# Altium PCB KeyBoard.PcbDoc
Units mm, origin at the board's own origin, x right, y up, seen from the top; angles counter-clockwise.
Board outline 100.33 x 80.33 mm, 2 copper layers (Top Layer, Bottom Layer); 58 components, 46 nets, 201 pads, 48 vias.
Unrouted connection lines stored in the file: 1.
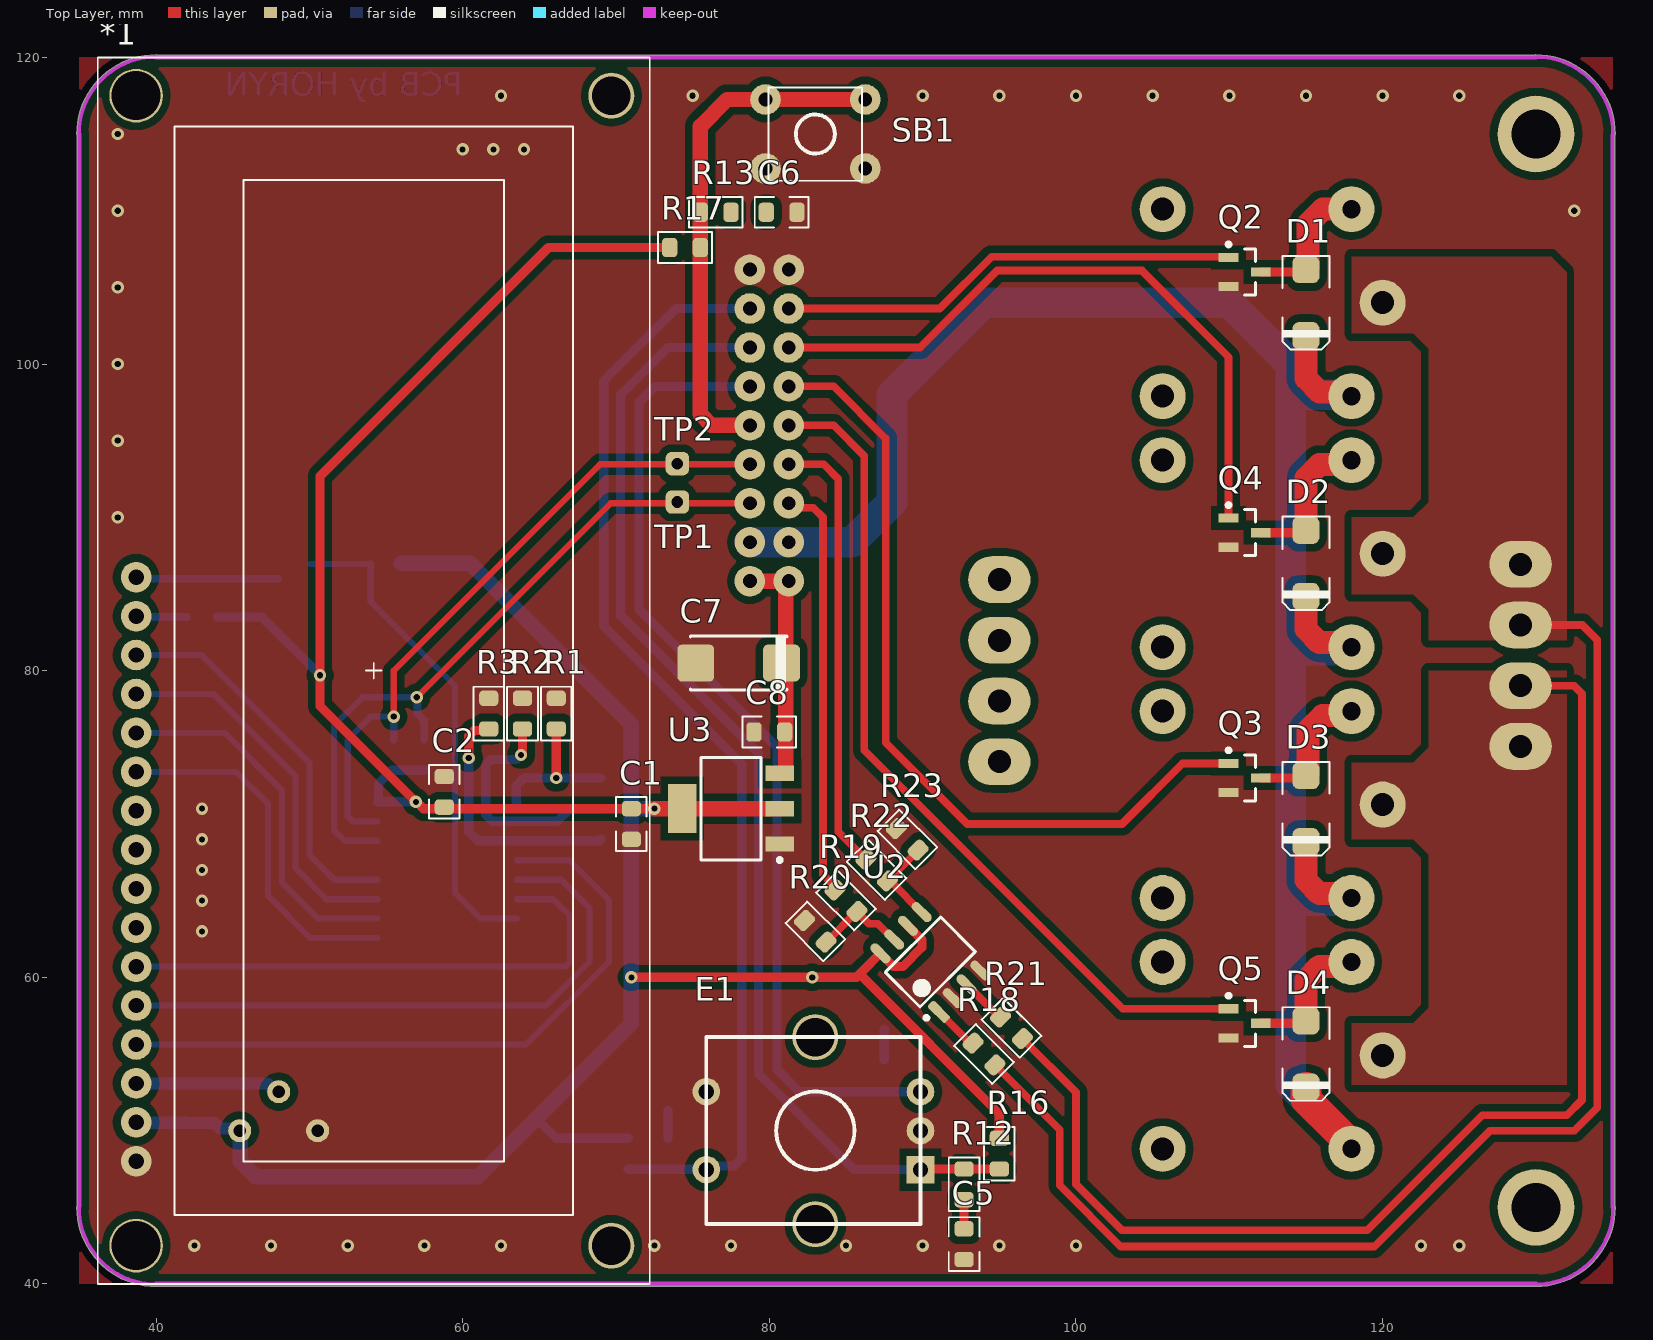
[diagram p0: Top Layer view]
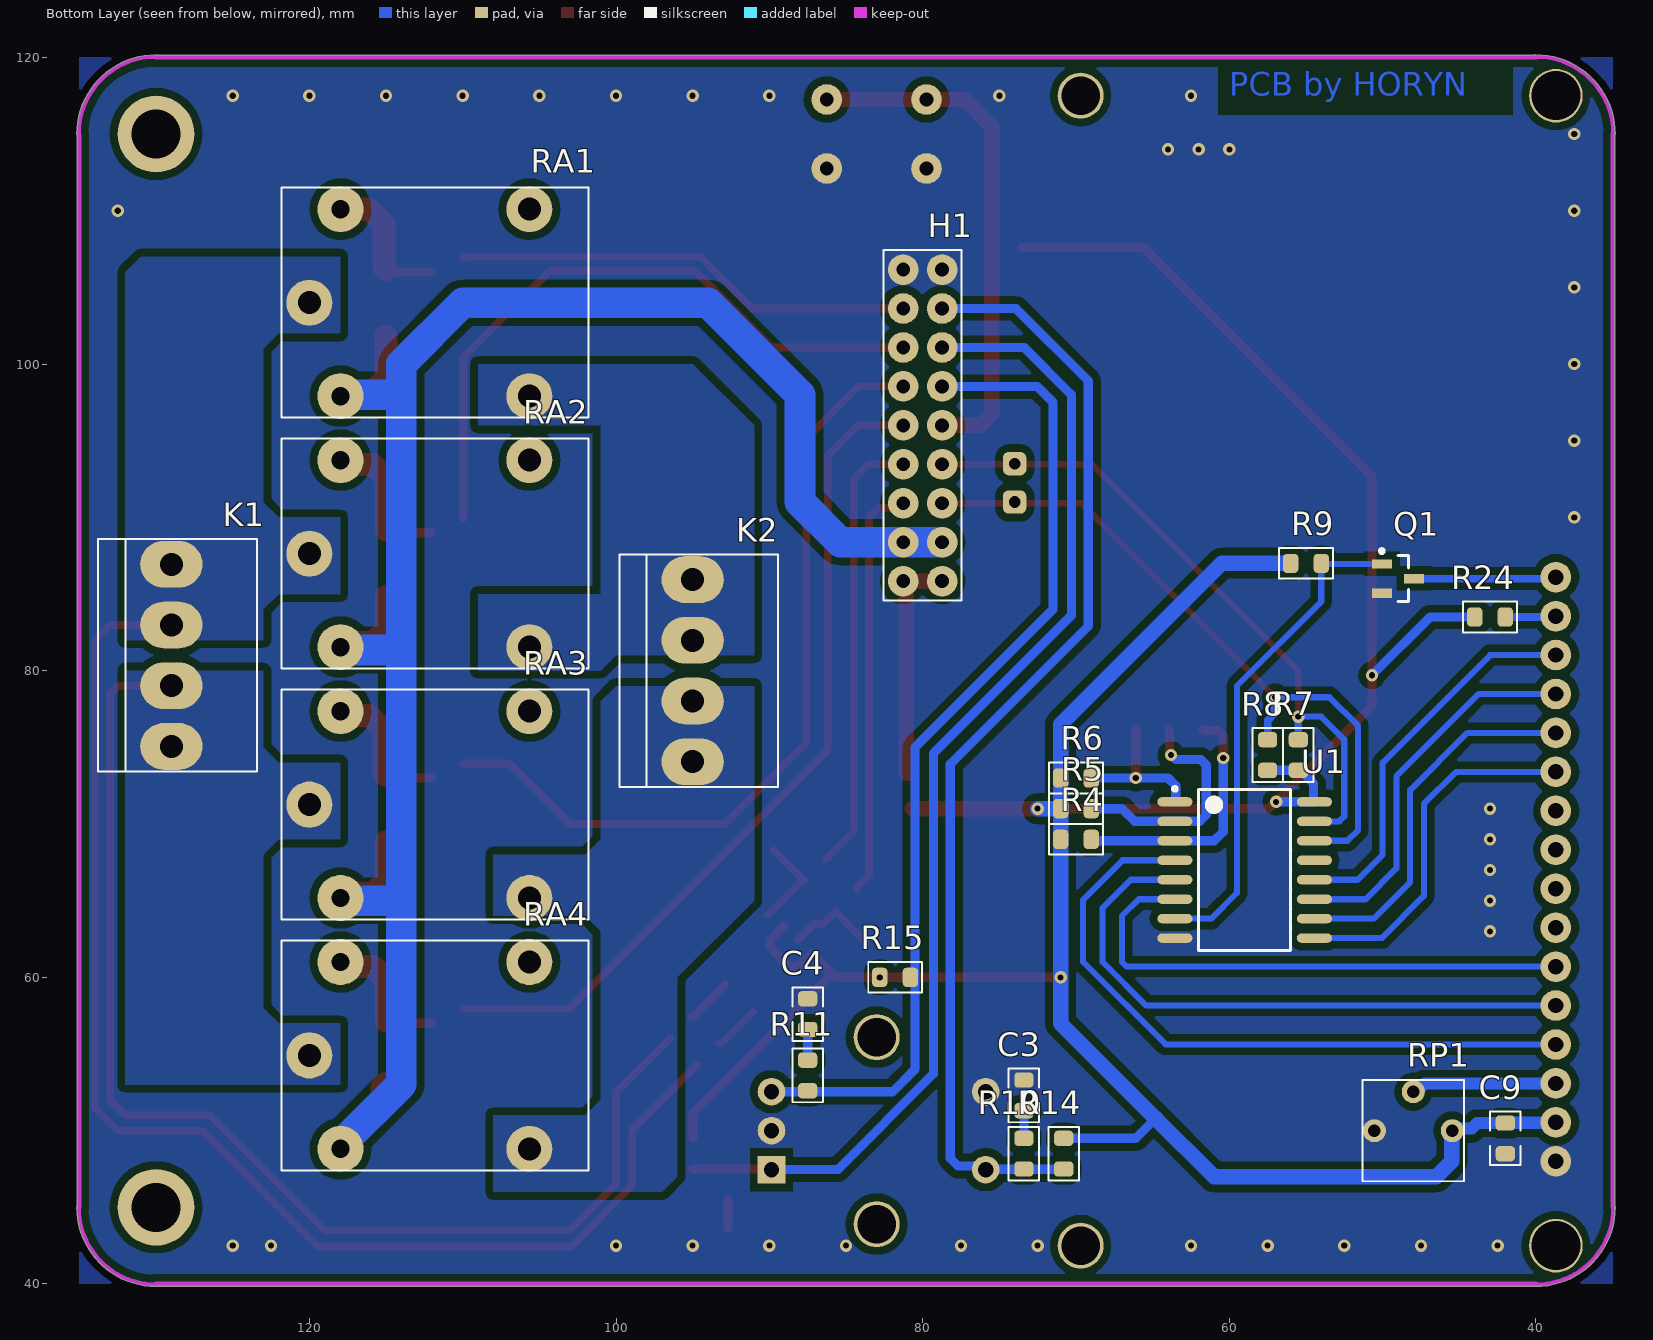
[diagram p1: Bottom Layer view, seen from below]
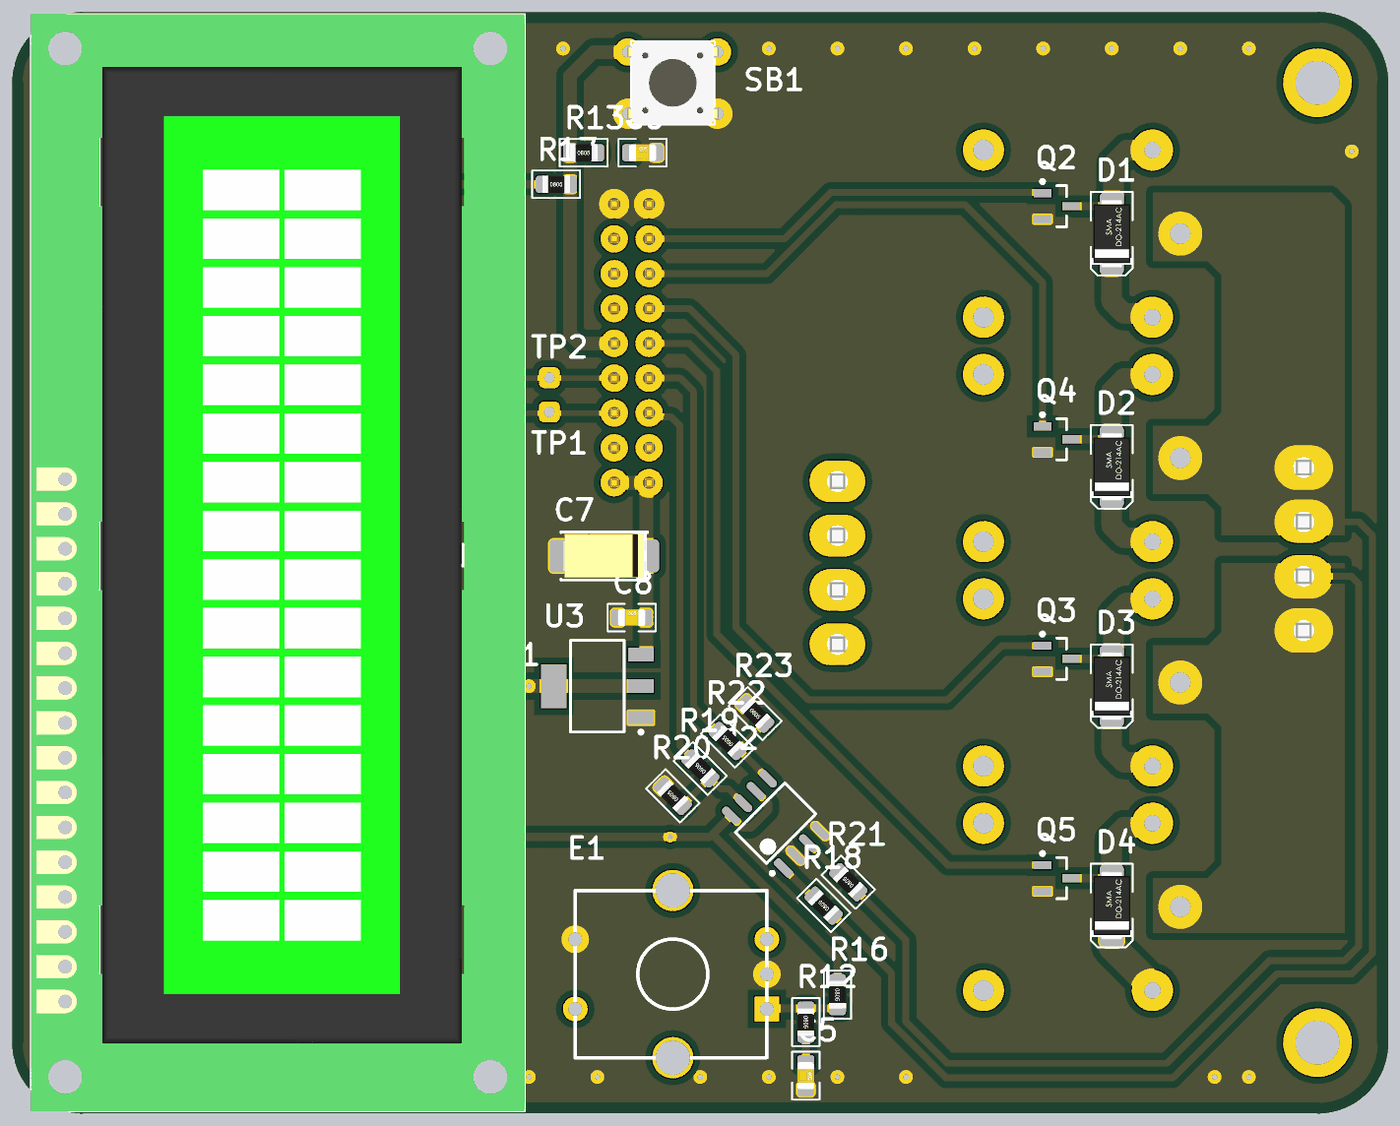
[diagram p2: 3D render of the assembled board from above, using the file's embedded part models]
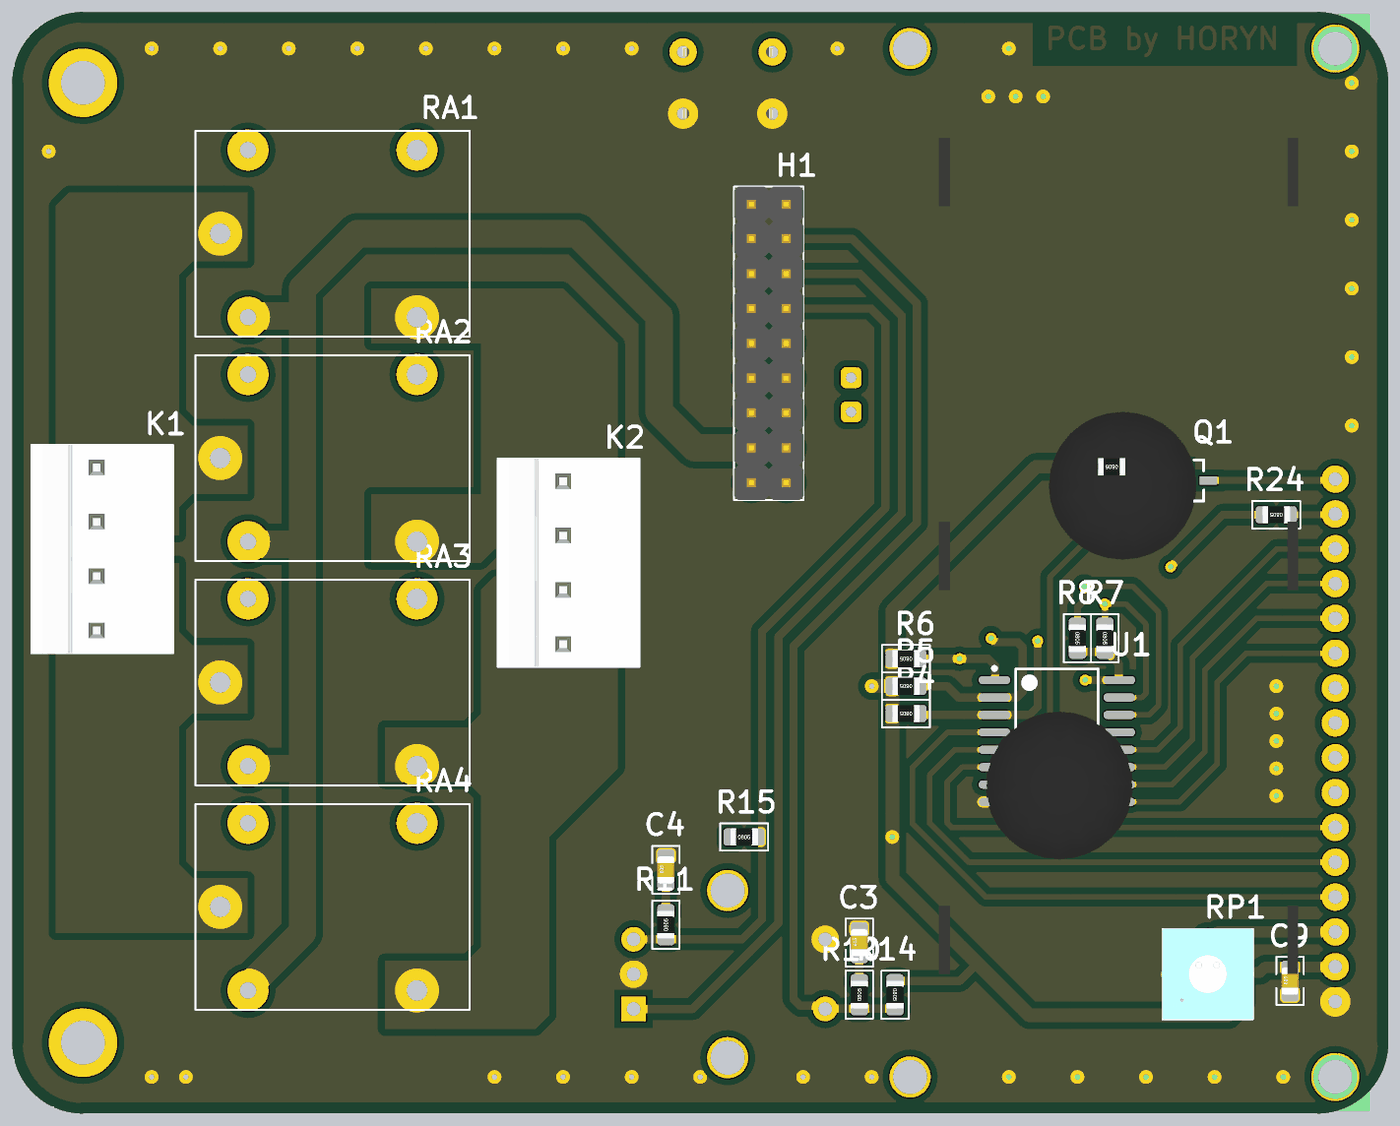
[diagram p3: 3D render of the assembled board from below, using the file's embedded part models]

## Layer stack, top to bottom
Top Solder: solder mask 0.0102, Solder Resist, Dk 3.5
Top Layer: signal copper 0.0356
Dielectric 1: dielectric 0.32, FR-4, Dk 4.8
Bottom Layer: signal copper 0.0356
Bottom Solder: solder mask 0.0102, Solder Resist, Dk 3.5

## Board outline
40,39.837 cw(c40,45) 34.837,45 cw(c34.964,45) 34.85,45.056 34.85,114.944 cw(c34.964,115) 34.837,115 cw(c40,115) 40,120.163 cw(c40,120.036) 40.056,120.15 129.944,120.15 cw(c130,120.036) 130,120.163 cw(c130,115) 135.163,115 cw(c135.036,115) 135.15,114.944 135.15,45.056 cw(c135.036,45) 135.163,45 cw(c130,45) 130,39.837 cw(c130,39.964) 129.944,39.85 40.056,39.85 cw(c40,39.964)

## Design rules (kind name [scope] priority, off if disabled: settings)
Clearance Clearance_12V [InNet('12V')] p1: gap=0.5 ignorepadtopadclearanceinfootprint=FALSE
Clearance Clearance_GND [InNet('GND')] p2: gap=0.5 ignorepadtopadclearanceinfootprint=FALSE
Clearance [All] p3: gap=0.3 ignorepadtopadclearanceinfootprint=FALSE
ComponentClearance [All] p1: gap=0 collisioncheckmode=3 verticalgap=0 showdistances=FALSE
PolygonConnect [All] p1: connectstyle=Direct reliefconductorwidth=0.254 reliefentries=4 polygonreliefangle="90 Angle" airgapwidth=0.254
RoutingVias [All] p1: holewidth=0.711 width=1.27 viastyle="Through Hole" minholewidth=0.711 minwidth=1.27 maxholewidth=0.711 maxwidth=1.27
SolderMaskExpansion [All] p1: expansion=0.102
Width [All] p1: maxlimit=10 minlimit=0.3 preferedwidth=0.3
29 further rules are at their usual default settings.

## Classes and differential pairs
component class PWR: C7 C8 C9 U3
component class MCU: C3 C4 C5 C6 D1 D2 D3 D4 E1 H1 K1 K2 Q2 Q3 Q4 Q5 R10 R11 R12 R13 R14 R15 R16 R17 R18 R19 R20 R21 R22 R23 RA1 RA2 RA3 RA4 SB1 TP1 TP2 U2
component class LCD: *1 C1 C2 Q1 R1 R2 R3 R4 R5 R6 R7 R8 R9 R24 RP1 U1

## Components (designator, comment, footprint, x,y, rotation, side; value= is the part's Value field where it differs from the comment)
*1 "AC162B 2x16" "AC-162B 2x16" 54.2,80 r90 top
C1 "100n" C0805(2013) 71,70 r90 top
C2 "100n" C0805(2013) 58.8,72.1 r270 top
C3 "100n" C0805(2013) 73.4,52.3 r90 bottom
C4 "100n" C0805(2013) 87.5,57.6 r90 bottom
C5 "100n" C0805(2013) 92.7,42.6 r270 top
C6 "100n" C0805(2013) 80.8,109.9 r0 top
C7 "x" "EL Case C (6032-28)" 78,80.5 r180 top
C8 "100n" C0805(2013) 80,76 r0 top
C9 "100n" C0805(2013) 42,49.5 r90 bottom
D1 "1N4148" "DO-214AC (SMA)" 115,104 r270 top
D2 "1N4148" "DO-214AC (SMA)" 115,87 r270 top
D3 "1N4148" "DO-214AC (SMA)" 115,71 r270 top
D4 "1N4148" "DO-214AC (SMA)" 115,55 r270 top
E1 "Encoder SW" PEC12 83,50 r0 top
H1 "H-2x9" J2x9 80,96 r90 bottom
K1 "PWL4S" PWL4S 129,81 r90 bottom
K2 "PWL4S" PWL4S 95,80 r90 bottom
Q1 "BC817-40" SOT23_N 49,86 r180 bottom
Q2 "BC817-40" SOT23_N 111,106 r0 top
Q3 "BC817-40" SOT23_N 111,73 r0 top
Q4 "BC817-40" SOT23_N 111,89 r0 top
Q5 "BC817-40" SOT23_N 111,57 r0 top
R1 "0R" R0805 66.1,77.2 r90 top
R2 "0R" R0805 63.9,77.2 r90 top
R3 "0R" R0805 61.7,77.2 r90 top
R4 "10K" R0805 70,69 r0 bottom
R5 "10K" R0805 70,71 r0 bottom
R6 "10K" R0805 70,73 r0 bottom
R7 "4.7K" R0805 55.5,74.5 r270 bottom
R8 "4.7K" R0805 57.5,74.5 r270 bottom
R9 "10K" R0805 55,87 r0 bottom
R10 "100R" R0805 73.4,48.5 r90 bottom
R11 "100R" R0805 87.5,53.6 r90 bottom
R12 "100R" R0805 92.7,46.5 r270 top
R13 "100R" R0805 76.5,109.9 r0 top
R14 "10K" R0805 70.8,48.5 r270 bottom
R15 "10K" R0805 81.8,60 r180 bottom
R16 "10K" R0805 95,48.5 r270 top
R17 "10K" R0805 74.5,107.6 r0 top
R18 "1k" R0805 94,55 r135 top
R19 "100R" R0805 85,65 r135 top
R20 "10K" R0805 83,63 r135 top
R21 "1k" R0805 95.793,56.707 r135 top
R22 "100R" R0805 87,67 r135 top
R23 "10K" R0805 89,69 r315 top
R24 "0R" R0805 43,83.5 r0 bottom
RA1 "RAS" "Rele RAS" 111.808,104 r180 bottom
RA2 "RAS" "Rele RAS" 111.808,87.635 r180 bottom
RA3 "RAS" "Rele RAS" 111.808,71.269 r180 bottom
RA4 "RAS" "Rele RAS" 111.808,54.904 r180 bottom
RP1 "10k" "R-Tr 3362P" 48,50 r180 bottom
SB1 "TS-06" TS-06 83,115 r90 top
TP1 "TP" TP_TH 74,91 r0 top
TP2 "TP" TP_TH 74,93.5 r90 top
U1 "PCF8574DW" DW16_N 59,67 r180 bottom
U2 "MOCD217" "SO-8 (MOCD217)" 90.5,61 r135 top
U3 "TLV1117LV30DCYT" TI-DCY4_N 77.5,71 r180 top

## Footprints (in the part's own frame and the unit in brackets; to place one, negate y for a bottom-side part, rotate by r counter-clockwise, add the part's x,y. Pads: shape width x height; smd on the part's side, far side on the other; paste and mask are expansions set on the pad)
"AC-162B 2x16" [mm]
  round 3 hole 2.5: 0(-37.5,-15.5) 0(37.5,-15.5)
  round 3.5 hole 3.2: 0(-37.5,15.5) 0(37.5,15.5)
  round 2 hole 1: 1(-32,15.5) 2(-29.46,15.5) 3(-26.92,15.5) 4(-24.38,15.5) 5(-21.84,15.5) 6(-19.3,15.5) 7(-16.76,15.5) 8(-14.22,15.5) 9(-11.68,15.5) 10(-9.14,15.5) 11(-6.6,15.5) 12(-4.06,15.5) 13(-1.52,15.5) 14(1.02,15.5) 15(3.56,15.5) 16(6.1,15.5)
  silkscreen extent -40,-18 40,18, body extent -40,-18 40,18, height 11
C0805(2013) [mm]
  rrect50% 1x1.25 smd: 1(-1,0) 2(1,0)
  silkscreen extent -1.75,-1 1.75,1, body extent -1,-0.62 1,0.63, height 0.73
"DO-214AC (SMA)" [mil] "DO-214-AC/SMA; 2 C-Bend Leads; Body 5 x 2.7 mm, inc. leads (LxW)"
  rrect50% 70x70 smd: 1(-85,0) 2(85,0)
  silkscreen extent -120,-60 120,60, body extent -98,-53 98,53, height 85
DW16_N [mm] "SOIC, 16-Leads, Body 10.3x7.5mm, Pitch 1.27mm, IPC Medium Density"
  oval 2.3x0.6 smd: 1(-4.55,4.445) 2(-4.55,3.175) 3(-4.55,1.905) 4(-4.55,0.635) 5(-4.55,-0.635) 6(-4.55,-1.905) 7(-4.55,-3.175) 8(-4.55,-4.445) 9(4.55,-4.445) 10(4.55,-3.175) 11(4.55,-1.905) 12(4.55,-0.635) 13(4.55,0.635) 14(4.55,1.905) 15(4.55,3.175) 16(4.55,4.445)
  silkscreen extent -4.67,-5.25 3,5.42, body extent -3.79,-5.25 3.8,5.25, height 2.64
"EL Case C (6032-28)" [mm] "Capacitor, SM Tantalum; Body 6.0 x 3.2 mm (LxW typ)"
  rrect25% 2.4x2.4 smd: 1(-2.8,0) 2(2.8,0)
  silkscreen extent -3.15,-1.75 3.15,1.75, body extent -3,-1.6 3,1.6, height 2.51
J2x9 [mm]
  round 2 hole 0.9: 1(-10.16,-1.27) 2(-10.16,1.27) 3(-7.62,-1.27) 4(-7.62,1.27) 5(-5.08,-1.27) 6(-5.08,1.27) 7(-2.54,-1.27) 8(-2.54,1.27) 9(0,-1.27) 10(0,1.27) 11(2.54,-1.27) 12(2.54,1.27) 13(5.08,-1.27) 14(5.08,1.27) 15(7.62,-1.27) 16(7.62,1.27) 17(10.16,-1.27) 18(10.16,1.27)
  silkscreen extent -11.43,-2.54 11.43,2.54, body extent -11.43,-2.54 11.43,2.54, height 10.1
PEC12 [mm] "Incremental encoder with switch"
  rect 1.8x1.8 hole 1: 1(6.858,-2.54)
  round 1.8 hole 1: 2(6.858,0) 3(6.858,2.54) 4(-7.112,-2.54) 5(-7.112,2.54)
  round 3 hole 2.5: 6(0,-6.096) 7(0,6.096)
  silkscreen extent -7.11,-6.1 6.86,6.1
PWL4S [mm]
  oval 3.048x4.064 hole 1.5: 1(5.94,0) 2(1.98,0) 3(-1.98,0) 4(-5.94,0)
  silkscreen extent -7.59,-5.57 7.59,4.78, body extent -7.59,-5.57 7.59,4.78, height 15
R0805 [mm]
  rrect50% 1x1.25 smd: 1(-1,0) 2(1,0)
  silkscreen extent -1.75,-1 1.75,1, body extent -1,-0.62 1,0.63, height 0.6
"R-Tr 3362P" [mm]
  round 1.5 hole 0.8: 1(-2.54,0) 2(0,2.54) 3(2.54,0)
  silkscreen extent -3.3,-3.3 3.3,3.3, body extent -3.3,-3.3 3.3,3.3, height 4.4
"Rele RAS" [mm]
  round 3 hole 1.2: 1(-6.16,-6.096) 2(-6.159,6.096)
  round 3 hole 1.5: 3(6.16,6.096) 4(-8.191,0) 5(6.159,-6.096)
  silkscreen extent -10,-7.5 10,7.5, body extent -10,-7.5 10,7.5, height 15.25
"SO-8 (MOCD217)" [mm] "SOIC, 8-Leads, Body 5.1x4.2mm (max), Pitch 1.27mm, IPC Medium Density"
  rrect50% 1.6x0.6 smd: 1(-2.7,1.905)
  oval 1.6x0.6 smd: 2(-2.7,0.635) 3(-2.7,-0.635) 4(-2.7,-1.905) 5(2.7,-1.905) 6(2.7,-0.635) 7(2.7,0.635) 8(2.7,1.905)
  silkscreen extent -2.52,-2.55 1.6,2.88, body extent -2.08,-2.56 2.08,2.57, height 3.63
SOT23_N [mm] "SOT23, 3-Leads, Body 2.9x1.3mm, Pitch 0.95mm, Lead Span 2.3mm, IPC Medium Density"
  rect 1.3x0.6 smd: 1(-1.05,0.95) 2(-1.05,-0.95) 3(1.05,0)
  silkscreen extent -1.18,-1.5 0.7,1.92, body extent -0.7,-1.5 0.7,1.5, height 1.1
TI-DCY4_N [mm] "SOT223, 4-Leads, Body 6.5x3.5mm, Pitch 2.3mm, IPC Medium Density"
  rect 1.85x1 smd: 1(-3.175,2.3) 2(-3.175,0) 3(-3.175,-2.3)
  rect 1.85x3.2 smd: 4(3.175,0)
  silkscreen extent -3.3,-3.35 1.95,3.47, body extent -1.85,-3.35 1.85,3.35, height 1.8
TP_TH [mil] "Test point THT"
  rrect50% 60x60 hole 30: 1(0,0)
TS-06 [mm]
  round 2 hole 0.9: 1(-2.25,3.25) 1(-2.25,-3.25) 2(2.25,3.25) 2(2.25,-3.25)
  silkscreen extent -3.05,-3.05 3.05,3.05, body extent -3,-3.3 3,3.3, height 3.95

## Part data
C1 C2 C3 C4 C5 C6 C8 C9: library part "C-0805   50V 100n", "SMD-0805 50V Y5V +80/-20%", Price=0.05
C7: library part "EL Case C (6032-28)", "EL Tantalum Case C (6032-28)", Price=0.41
D1 D2 D3 D4: "DO-35 75V 0.2A 1uS 4A 4nS", Price=0.02
E1: "Mechanical encoder with switch", LatestRevisionDate=17-Jul-2002, LatestRevisionNote="Re-released for DXP Platform.", PackageReference=VR5, Published=8-Jun-2000, Publisher="Altium Limited", Set Position=0.5, Sim Note="Enter the Resistance value and the set point into parameter fields."
K1 K2: "3.96mm 7A/250V", Price=0.17
Q1 Q2 Q3 Q4 Q5: "NPN General-purpose Transistor", ComponentLink1Description="Manufacturer Link", ComponentLink1URL=http://www.semiconductors.philips.com/, ComponentLink2Description=Datasheet, ComponentLink2URL=http://www.semiconductors.philips.com/acrobat/datasheets/BC817_BC817W_BC337_5.pdf, DatasheetVersion=Jun-1999, LatestRevisionDate=12-Dec-2006, LatestRevisionNote="IPC-7351 Footprint Added.", PackageDescription="3-Pin SOT-23 Package 0.95 mm Pitch, 2.3 mm Lead Span", PackageReference=SOT23, PackageVersion=May-1999, Published=17-Sep-2003, Publisher="Altium Limited"
R1 R2 R3 R4 R5 R6 R7 R8 R9 R10 R11 R12 R13 R14 R15 R16 R17 R18 R19 R20 R21 R22 R23 R24: library part R-0805, "SMD 0805 0.1W 5% 150V", Price=0.017
RA1 RA2 RA3 RA4: library part "Relay RAS", "AC-120V 15A DC-14V 20A 30V 15A /0.36W", Price=1.8
RP1: library part "R-Tr 3362F", "Bourns 3362F 0.5W", Price=0.2, Set Position=0.5
SB1: library part "Buton TS-06", Price=0.15
TP1 TP2: "Test point"
U1: "Remote 8-Bit I/O Expander for I2C-Bus, 2.5 to 6 V, -40 to 85 degC, 16-pin SOIC (DW), Green (RoHS & no Sb/Br)", Manufacturer="Texas Instruments", Max Frequency(kHz)=100, Supplier Part Number 1=296-26294-5-ND, Voltage Nodes(V)="5, 3.3", # of I/Os=8, Code_JEDEC=MS-013-AA, ComponentLink1Description=Datasheet, ComponentLink1URL=http://www.ti.com/general/docs/lit/getliterature.tsp?genericPartNumber=PCF8574&fileType=pdf, ComponentLink2Description="Package Specification", ComponentLink2URL=http://www.ti.com/litv/pdf/msoi003g, DatasheetVersion=SCPS068G, Eco-Plan="Green (RoHS & no Sb/Br)", fSCLK(Max)(MHz)=0.1, I2C Address="0100 xxx", Interrupt Output=Yes, Mounting Technology="Surface Mount", PackageDescription="16-Pin Small Outline Integrated Circuit, 10.3 x 7.5 mm, Pitch 1.27 mm Pitch", PackageReference=DW16, PackageVersion="revG, Jan-2011", PartNumber=PCF8574DW, Push-Pull I/O Type=Yes, Reset Input=No, SubFamily="I2C IO Expander", Supplier 1=Digi-Key, Supplier 2=Newark, Supplier 3=Mouser, Supplier Part Number 2=75C5236, Supplier Part Number 3=595-PCF8574DW, VCC(Max)(V)=6, VCC(Min)(V)=2.5, Vcc range(V)="2.5 to 6.0"
U2: "Dual optocouple"
U3: "Single Output LDO, 1 A, Fixed 3 V Output, 2 to 5.5 V Input, 4-pin SOT-223 (DCY), -40 to 125 degC, Green (RoHS & no Sb/Br)", Manufacturer="Texas Instruments", Supplier Part Number 1=296-34848-2-ND, Accuracy(%)=2, Code_JEDEC=TO-261, ComponentLink1Description="Manufacturer URL", ComponentLink1URL=http://www.ti.com/, ComponentLink2Description=Datasheet, ComponentLink2URL=http://www.ti.com/general/docs/lit/getliterature.tsp?genericPartNumber=TLV1117LV30&fileType=pdf, ComponentLink3Description="Package Specification", ComponentLink3URL=http://www.ti.com/litv/pdf/mpds094a, DatasheetVersion=SBVS160A, Eco-Plan="Green (RoHS & no Sb/Br)", Fixed Output Options(V)=3, Iout(Max)(A)=1, Iq(Typ)(mA)=0.05, Mounting Technology="Surface Mount", PackageDescription="4-Pin Plastic Small Outline, Body 3.5 x 6.5 mm, Pitch 2.3 mm", PackageReference=DCY4, PackageVersion=4202506/B, PartNumber=TLV1117LV30DCYT, SubFamily="Single Channel LDO", Supplier 1=Digi-Key, Supplier 2=Farnell, Supplier 3=Newark, Supplier 4=Newark, Supplier 5=Mouser, Supplier Part Number 2=2214986, Supplier Part Number 3=45W6437, Supplier Part Number 4=27W9631, Supplier Part Number 5=595-TLV1117LV30DCYT, Vdo(Typ)(mV)=1200, Vin(Max)(V)=5.5, Vin(Min)(V)=2, Vout Adj(Max)(V)=3, Vout Adj(Min)(V)=3
H1: Price=0.18

## Free pads (board coordinates)
  round 5 hole 3.2: 0(130,45) 0(130,115)

## Via types
v1: diameter 0.8, hole 0.4, Top Layer to Bottom Layer, 48 vias

## Nets (pads, with @x,y where several pads share a name; then routed paths per layer and width w, separated by ;. In a path a pad name is that pad's centre, name@x,y a point inside that pad or via, vN(x,y) a via of type N, cw(c..) or ccw(c..) an arc to the next point about the centre after c; other vN are vias at no path point)
5V: C7.1 C8.2 H1.1 H1.2 U3.3 | length 15.6
  Top Layer w1: H1.1 H1.2 81.079,85.649 81.079,80.5 81.079,76 81.079,73.3 U3.3
12V: D1.2 D2.2 D3.2 D4.2 H1.3 H1.4 RA1.1 RA2.1 RA3.1 RA4.1 | length 135.6
  Top Layer w1.5: D3.2 115,66.339 115.879,65.46 117.681,65.46 RA3.1 ; D2.2 115,82.704 115.879,81.826 117.681,81.826 RA2.1 ; D1.2 115,99.07 115.879,98.191 117.681,98.191 RA1.1
  Top Layer w2: D4.2 115,52.047 117.968,49.079 RA4.1
  Bottom Layer w2: H1.3 H1.4 85.38,88.38 88,91 88,98 94,104 110,104 114,100 114,98 ; RA4.1 117.968,49.079 114,53.047 114,65 ; RA3.1 117.795,65 114,65 ; RA2.1 117.777,81.347 114.347,81.347 114,81 ; RA1.1 117.872,98 114,98 ; 114,65 114,81 ; 114,81 114,98
A: K2.1 K2.2 RA1.5 RA2.5
A0: R1.1 R6.1 U1.1 | length 10
  Top Layer w0.6: v1(66.1,73) R1.1
  Bottom Layer w0.6: U1.1 63.5,71.445 63.5,72.5 64,73 R6.1
A1: R2.1 R5.1 U1.2 | length 15.6
  Top Layer w0.6: v1(63.8,74.5) 63.9,74.6 R2.1
  Bottom Layer w0.6: v1(63.8,74.5) 63.5,74.2 61.851,74.2 61.5,73.849 61.5,70.6 61.925,70.175 U1.2 66.175,70.175 67,71 R5.1
A2: R3.1 R4.1 U1.3 | length 16.6
  Top Layer w0.6: v1(60.4,74.3) 60.4,75.749 60.751,76.1 61.6,76.1 R3.1
  Bottom Layer w0.6: v1(60.4,74.3) 60.4,69.5 60.995,68.905 U1.3 68.905,68.905 R4.1
B: K2.3 K2.4 RA3.5 RA4.5
btnOn: H1.9 R13.1 R17.2 SB1.2 | length 33.8
  Top Layer w1: H1.9 76.23,96 75.5,96.73 75.5,115.5 77.25,117.25 79.75,117.25 SB1.2@86.25,117.25
encA: E1.1 H1.13 R12.1 R16.2 | length 76
  Top Layer w0.6: E1.1 89.898,47.5 R16.2
  Bottom Layer w0.6: H1.13 73.38,101.08 70.3,98 70.3,83.6 79.3,74.6 79.3,53.7 85.54,47.46 E1.1
encB: E1.3 H1.11 R11.1 R15.2 | length 64.9
  Bottom Layer w0.6: H1.11 72.54,98.54 71.5,97.5 71.5,84 80.5,75 80.5,60.1 80.5,54 81.96,52.54 85.7,52.54 87.5,52.54 E1.3
encBtn: E1.4 H1.15 R10.1 R14.2 | length 73.6
  Bottom Layer w0.6: R14.2 70.82,47.48 75.868,47.48 E1.4 76.116,47.688 77.688,47.688 78.2,48.2 78.2,73.9 69.2,82.9 69.2,98.9 73.92,103.62 H1.15
GND: *1.1 C1.1 C2.1 C3.2 C4.2 C5.2 C6.2 C7.2 C8.1 C9.1 E1.2 E1.5 H1.17 H1.18 Q1.2 Q2.2 Q3.2 Q4.2 Q5.2 R1.2 R2.2 R3.2 R20.2 R23.1 RP1.1 SB1.1 U1.8 U2.2 U2.4 U3.1
  other v1: 42.5,42.5 47.5,42.5 52.5,42.5 57.5,42.5 62.5,42.5 72.5,42.5 77.5,42.5 85,42.5 90,42.5 95,42.5 100,42.5 122.5,42.5 125,42.5 43,63 43,65 43,67 43,69 43,71 37.5,90 37.5,95 37.5,100 37.5,105 37.5,110 132.5,110 60,114 62,114 64,114 37.5,115 62.5,117.5 75,117.5 90,117.5 95,117.5 100,117.5 105,117.5 110,117.5 115,117.5 120,117.5 125,117.5
K: *1.16 Q1.3 | length 9.5
  Bottom Layer w0.4: *1.16@38.5,86.1 *1.16@38.6,86
  Bottom Layer w0.5: *1.16@38.6,86 Q1.3
Net*1_15: *1.15 R24.1 | length 3.5
  Bottom Layer w0.4: *1.15@38.5,83.56 *1.15@38.56,83.5
  Bottom Layer w0.5: *1.15@38.56,83.5 R24.1
NetC3_1: C3.1 R10.2 | length 1.8
  Bottom Layer w0.6: R10.2 C3.1
NetC4_1: C4.1 R11.2 | length 2
  Bottom Layer w0.6: R11.2 C4.1
NetC5_1: C5.1 R12.2 | length 1.9
  Top Layer w0.6: C5.1 R12.2
NetC6_1: C6.1 R13.2
NetD1_1: D1.1 Q2.3 RA1.2 | length 9.3
  Top Layer w0.6: Q2.3 114.841,106 D1.1
  Top Layer w1.5: D1.1 115.139,106.298 115.139,109.139 116.096,110.096 RA1.2
NetD2_1: D2.1 Q4.3 RA2.2 | length 9.9
  Top Layer w0.6: Q4.3 114.841,89 D2.1
  Top Layer w1.5: D2.1 115,92.565 115.879,93.444 117.681,93.444 RA2.2
NetD3_1: D3.1 Q3.3 RA3.2 | length 9.4
  Top Layer w0.6: Q3.3 114.841,73 D3.1
  Top Layer w1.5: D3.1 115.139,73.298 115.139,76.139 116.078,77.078 117.681,77.078 RA3.2
NetD4_1: D4.1 Q5.3 RA4.2 | length 9.1
  Top Layer w0.6: Q5.3 114.841,57 D4.1
  Top Layer w1.5: D4.1 115,59.834 115.879,60.713 117.681,60.713 RA4.2
NetR18_2: R18.2 U2.1 | length 3.1
  Top Layer w0.5: U2.1 93.099,55.707 R18.2
NetR19_1: R19.1 R20.1 U2.7 | length 6
  Top Layer w0.5: R20.1 R19.1 86.5,63.5 87.075,63.5 88.115,62.46 U2.7
NetR21_2: R21.2 U2.3 | length 3.1
  Top Layer w0.5: U2.3 94.984,57.414 R21.2
NetR22_1: R22.1 R23.2 U2.5 | length 6.1
  Top Layer w0.5: R23.2 R22.1 87.874,66.293 U2.5@90.084,64.084
OPTO_A: H1.6 R19.2 | length 27.2
  Top Layer w0.5: H1.6 81.557,90.633 82.867,90.633 83.5,90 83.5,66.682 84.293,65.889 R19.2
OPTO_B: H1.8 R22.2 | length 29.2
  Top Layer w0.5: H1.8 83.54,93.46 84.5,92.5 84.5,69.5 R22.2
OUT_A: K1.1 K1.2 R18.1 RA1.4 RA2.4 | length 86
  Top Layer w0.5: R18.1 98.939,50.061 98.939,46.429 102.929,42.439 119.439,42.439 127,50 132.5,50 134,51.5 134,82 133.02,82.98 K1.2
OUT_B: K1.3 K1.4 R21.1 RA3.4 RA4.4 | length 79.5
  Top Layer w0.5: R21.1@96.457,56.043 R21.1 100,52.5 100,46.5 103,43.5 119,43.5 126.5,51 132,51 133,52 133,78.5 132.48,79.02 K1.3
P0: *1.4 U1.4 | length 44.4
  Bottom Layer w0.4: *1.4@38.5,55.62 64.16,55.62 69.54,61 69.54,65.052 66.957,67.635 U1.4
P1: *1.5 U1.5 | length 40
  Bottom Layer w0.4: *1.5@38.5,58.16 65.43,58.16 68.27,61 68.27,64.526 66.431,66.365 U1.5
P2: *1.6 U1.6 | length 35.5
  Bottom Layer w0.4: *1.6@38.5,60.7 66.7,60.7 67,61 67,64 65.905,65.095 U1.6
P3: Q1.1 R9.1 U1.7 | length 32.5
  Bottom Layer w0.4: Q1.1 53.95,86.95 R9.1 54,84.5 59.5,79 59.5,65.5 61.175,63.825 U1.7
P4: *1.11 U1.9 | length 24
  Bottom Layer w0.4: *1.11@38.5,73.4 45.212,73.4 47.306,71.306 47.306,65.306 50.057,62.555 U1.9
P5: *1.12 U1.10 | length 24.5
  Bottom Layer w0.4: *1.12@38.5,75.94 44.468,75.94 48.204,72.204 48.204,66.204 50.583,63.825 U1.10
P6: *1.13 U1.11 | length 25
  Bottom Layer w0.4: *1.13@38.5,78.48 43.724,78.48 49.102,73.102 49.102,67.102 51.109,65.095 U1.11
P7: *1.14 U1.12 | length 25.5
  Bottom Layer w0.4: *1.14@38.5,81.02 42.98,81.02 50,74 50,68 51.635,66.365 U1.12
RA: H1.16 Q2.1 | length 30.1
  Top Layer w0.5: H1.16 91.12,103.62 94.5,107 109.9,107 Q2.1
RB: H1.14 Q4.1 | length 43.6
  Top Layer w0.5: H1.14 89.853,101.08 94.873,106.1 104.3,106.1 109.95,100.45 Q4.1
RC: H1.12 Q3.1 | length 53.8
  Top Layer w0.5: H1.12 84.2,98.54 87.6,95.14 87.6,75.3 92.9,70 103,70 106.95,73.95 Q3.1
RD: H1.10 Q5.1 | length 55.7
  Top Layer w0.5: H1.10 84.2,96 86.2,94 86.2,74.8 103.05,57.95 Q5.1
SCL: H1.5 R8.1 TP1.1 U1.14 | length 46.1
  Top Layer w0.4: v1(57,78.27) 69.65,90.92 H1.5
  Bottom Layer w0.4: U1.14 52.299,68.905 51.602,69.602 51.602,76.398 53.474,78.27 v1(57,78.27)
  Bottom Layer w0.5: v1(57,78.27) 57.057,78.213 57.057,77.193 57.5,76.75 R8.1
SDA: H1.7 R7.1 TP2.1 U1.15 | length 44
  Top Layer w0.4: v1(55.5,77) 55.5,80 68.96,93.46 H1.7
  Bottom Layer w0.4: U1.15 52.825,70.175 52.5,70.5 52.5,75.5 54,77 v1(55.5,77)
  Bottom Layer w0.5: R7.1 v1(55.5,77)
V0: *1.3 RP1.2 | length 9.7
  Bottom Layer w0.8: *1.3@38.5,53.08 47.271,53.08 47.811,52.54 RP1.2
VDD: *1.2 C1.2 C2.2 C9.2 R4.2 R5.2 R6.2 R7.2 R8.2 R9.2 R14.1 R15.1 R16.1 R17.1 R24.2 RP1.3 U1.16 U2.6 U2.8 U3.2 U3.4 | length 215
  Top Layer w0.6: v1(71,60) 85.682,60 86.041,60.359 ; v1(72.5,71) C1.2 59.5,71 57.444,71 56.999,71.445 v1(56.945,71.445) 50.7,77.69 v1(50.7,79.7) 50.7,92.7 65.6,107.6 R17.1 ; U2.6 89.95,62.448 89.95,61.95 88.7,60.7 88.106,60.7 U2.8 86.041,60.359 ; R16.1 95,51.1 86.041,60.059 86.041,60.359
  Top Layer w1: v1(72.5,71) U3.4 U3.2
  Bottom Layer w0.6: R24.2 46.9,83.5 v1(50.7,79.7) ; U1.16 U1.16@54.5,71.445 ; v1(56.945,71.445) U1.16@54.5,71.445 ; R8.2 R7.2 55.375,73.5 54.5,72.625 U1.16@54.5,71.445 ; 64.8,50.8 66.1,49.5 R14.1
  Bottom Layer w0.8: *1.2@38.5,50.54 38.52,50.52 41.98,50.52 C9.2 43.825,50.5 44.191,50.134 45.326,50.134 RP1.3
  Bottom Layer w1: RP1.3 45.5,49.96 45.5,48 46.5,47 61,47 64.8,50.8 71,57 v1(71,60) R4.2 R5.2 ; R9.2 60.5,87 71,76.5 R6.2 R5.2 ; v1(72.5,71) R5.2
  other v1: 82.8,60
pads on no net: *1.0 *1.7 *1.8 *1.9 *1.10 E1.6 E1.7 RA1.3 RA2.3 RA3.3 RA4.3 U1.13

## Polygon pours and split planes (outlines as drawn)
GND on Top Layer (solid, pour order 18): 35,40 35,120 135,120 135,40
OUT_A on Top Layer (solid, pour order 2): 118,102 118,107 131,107 132,106 132,82 123,82 123,84 122,85 118,85 118,90 122,90 123,91 123,101 122,102
OUT_B on Top Layer (solid, pour order 4): 132,80 123,80 123,75 122,74 118,74 118,69 122,69 123,68 123,58 122,57 118,57 118,53 132,53
GND on Bottom Layer (solid, pour order 20): 35,40 35,120 135,120 135,40
B on Bottom Layer (solid, pour order 16): 91,79 100,79 101,78 101,69 102,68 108,68 108,64 102,64 101,63 101,52 102,51 108,51 108,46 97,46 96,47 96,60 91,65
A on Bottom Layer (solid, pour order 14): 91,81 100,81 101,80 109,80 109,85 101,85 101,96 109,96 109,100 95,100 91,96
OUT_A on Bottom Layer (solid, pour order 10): 132,82 132,106 131,107 118,107 118,102 122,102 123,101 123,91 122,90 118,90 118,85 122,85 123,84 123,82
OUT_B on Bottom Layer (solid, pour order 8): 118,57 122,57 123,58 123,68 122,69 118,69 118,74 122,74 123,75 123,80 132,80 132,53 118,53

## Keep-outs
Keep-Out Layer:
  lines w0.254: 34.964,45 ccw(c40,45) 40,39.964 ; 34.964,115 cw(c40,115) 40,120.036 ; 130,39.964 ccw(c130,45) 135.036,45 ; 130,120.036 cw(c130,115) 135.036,115
  lines w0.3: 35,45.036 35,115 ; 40,40 130,40 ; 40,120 130,120 ; 135,45 135,114.964

## Other copper
Bottom Layer:
  text "PCB by HORYN" at 60,117.5 h1.52